# EAGLE board SISTEM MINIMUM ATMEGA16 trace LCD ADC 298 (EAGLE 5.06)
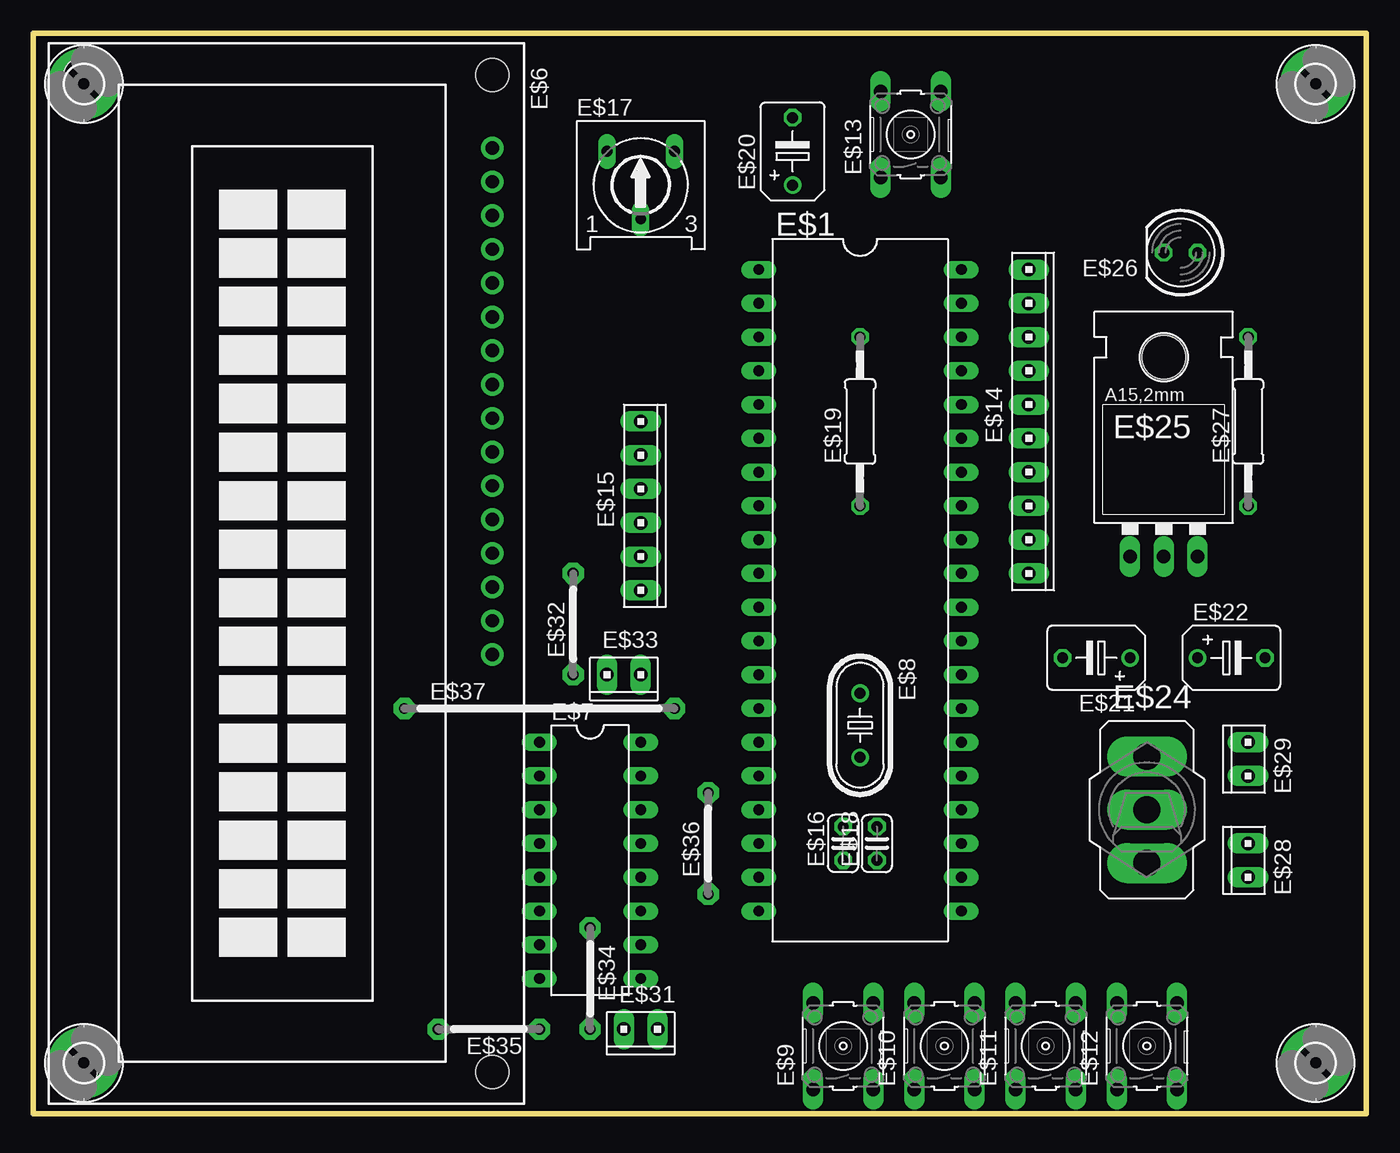
[diagram p0: board, top side]
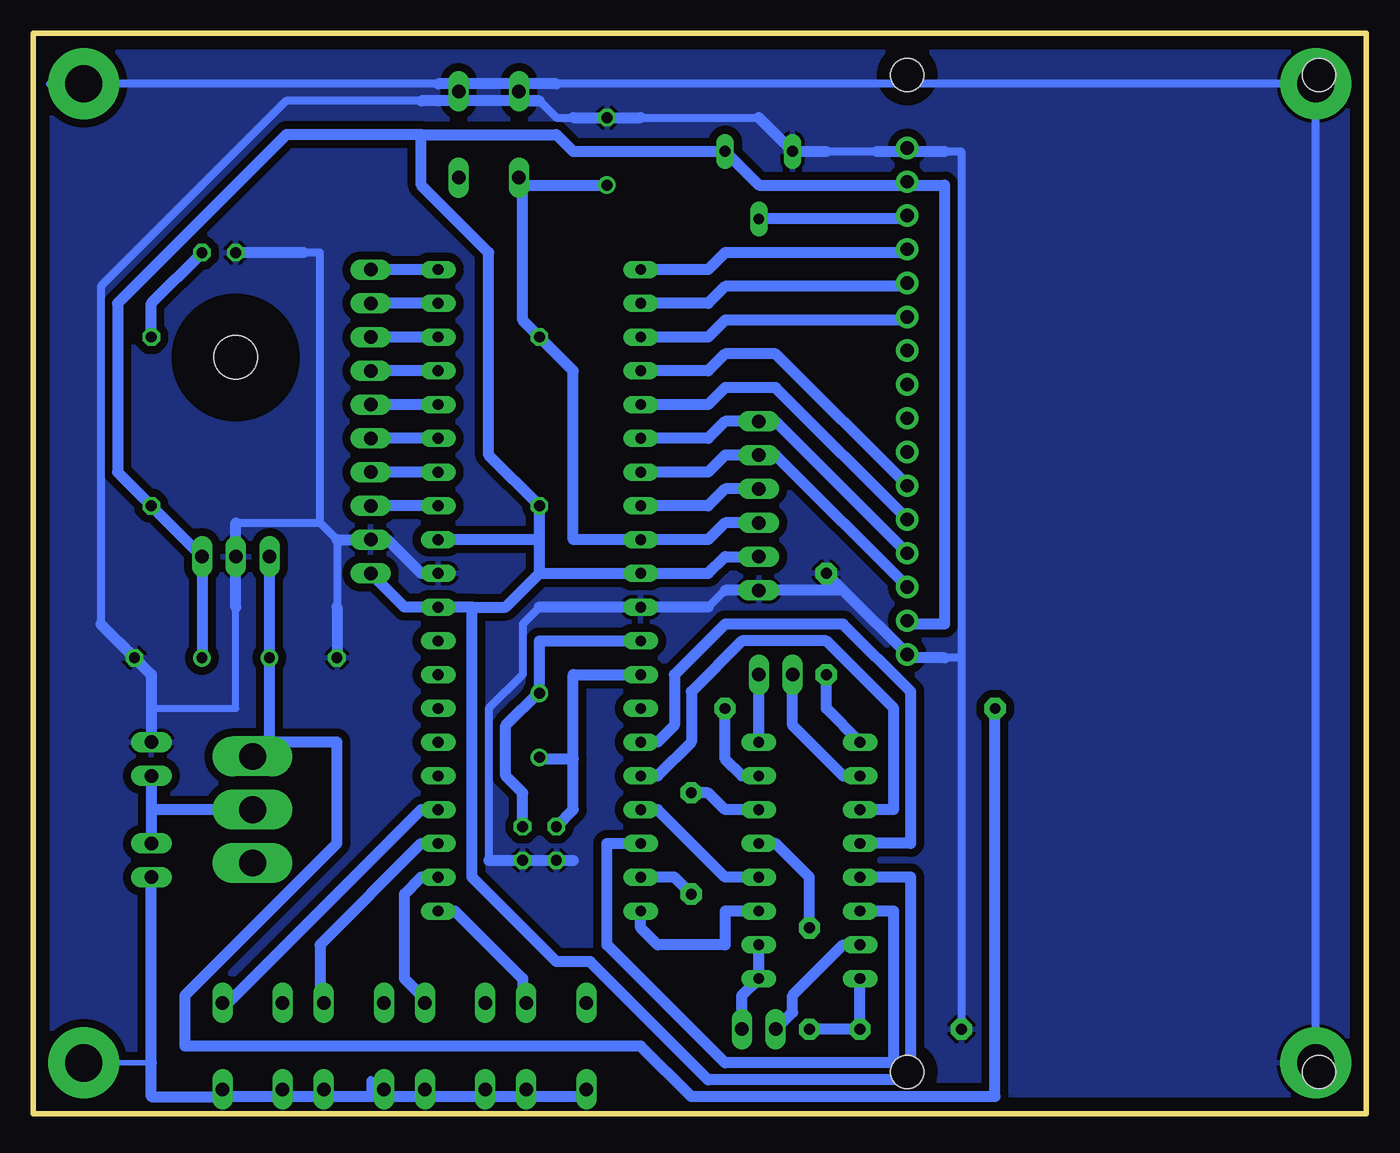
[diagram p1: board, bottom side, seen from below]

Size 100.33 x 81.28 mm. Coordinates in mm from the lower left corner, seen from the top.
Outline: 0,0 100.33,0 100.33,81.28 0,81.28 0,0
Copper layers (1*16): Top 0.035mm / dielectric 1.5mm / Bottom 0.035mm
Design rules "default *": minimum track width 20mil, minimum drill 24mil, track to track 10mil, track to pad 10mil, pad to pad 10mil, via to via 10mil, smd to smd 8mil, copper to edge 40mil, drill to drill 8mil, minimum pad ring 10mil, minimum via ring 8mil, stop-mask expansion 4mil, vias tented up to drill 0mil, thermal gap 10mil

## Footprints (pad centres in the part's own frame; a part is rotated, then mirrored left to right if it is on the bottom)
DIL40 = drill 0.813 long: 1 -24.13,-7.62; 2 -21.59,-7.62; 3 -19.05,-7.62; 4 -16.51,-7.62; 5 -13.97,-7.62; 6 -11.43,-7.62; 7 -8.89,-7.62; 8 -6.35,-7.62; 9 -3.81,-7.62; 10 -1.27,-7.62; 11 1.27,-7.62; 12 3.81,-7.62; 13 6.35,-7.62; 14 8.89,-7.62; 15 11.43,-7.62; 16 13.97,-7.62; 17 16.51,-7.62; 18 19.05,-7.62; 19 21.59,-7.62; 20 24.13,-7.62; 21 24.13,7.62; 22 21.59,7.62; 23 19.05,7.62; 24 16.51,7.62; 25 13.97,7.62; 26 11.43,7.62; 27 8.89,7.62; 28 6.35,7.62; 29 3.81,7.62; 30 1.27,7.62; 31 -1.27,7.62; 32 -3.81,7.62; 33 -6.35,7.62; 34 -8.89,7.62; 35 -11.43,7.62; 36 -13.97,7.62; 37 -16.51,7.62; 38 -19.05,7.62; 39 -21.59,7.62; 40 -24.13,7.62
2,8-PAD = drill 2.8 pad 5.334 round: B2,8 0,0
TUXGR_16X2_R2 = drill 1 pad 1.676 round: 1 -32,15.5; 2 -29.46,15.5; 3 -26.92,15.5; 4 -24.38,15.5; 5 -21.84,15.5; 6 -19.3,15.5; 7 -16.76,15.5; 8 -14.22,15.5; 9 -11.68,15.5; 10 -9.14,15.5; 11 -6.6,15.5; 12 -4.06,15.5; 13 -1.52,15.5; 14 1.02,15.5; 15 3.56,15.5; 16 6.1,15.5 | hole 2.5: -37.5,-15.5; 37.5,-15.5; -37.5,15.5; 37.5,15.5
DIL16 = drill 0.813 long: 1 -8.89,-3.81; 2 -6.35,-3.81; 3 -3.81,-3.81; 4 -1.27,-3.81; 5 1.27,-3.81; 6 3.81,-3.81; 7 6.35,-3.81; 8 8.89,-3.81; 9 8.89,3.81; 10 6.35,3.81; 11 3.81,3.81; 12 1.27,3.81; 13 -1.27,3.81; 14 -3.81,3.81; 15 -6.35,3.81; 16 -8.89,3.81
HC49U-V = drill 0.813 round: 1 -2.413,0; 2 2.413,0
B3F-10XX = drill 1.016 long: 1 -3.251,2.261; 2 3.251,2.261; 3 -3.251,-2.261; 4 3.251,-2.261
10X10MTA = drill 1.016 long: 1 11.43,0; 2 8.89,0; 3 6.35,0; 4 3.81,0; 5 1.27,0; 6 -1.27,0; 7 -3.81,0; 8 -6.35,0; 9 -8.89,0; 10 -11.43,0
10X06MTA = drill 1.016 long: 1 6.35,0; 2 3.81,0; 3 1.27,0; 4 -1.27,0; 5 -3.81,0; 6 -6.35,0
C025-024X044 = drill 0.813 octagon: 1 -1.27,0; 2 1.27,0
RS3 = drill 0.813 long: A -2.54,2.54; E 2.54,2.54; S 0,-2.54
0207/12 = drill 0.813 octagon: 1 -6.35,0; 2 6.35,0
B45181B = drill 0.813 round: + -2.54,0 | drill 0.813 octagon: - 2.54,0
320-916 = drill 2.007 long: 1 0,4.013; 2 0,0; 3 0,-4.013
78XXL = drill 1.016 long: GND 0,-3.81; IN -2.54,-3.81; OUT 2.54,-3.81 | hole 3.302: 0,11.176
LED5MM = drill 0.813 octagon: A -1.27,0; K 1.27,0
10X02MTA = drill 1.016 long: 1 1.27,0; 2 -1.27,0
07 = drill 0.813 pad 1.6 octagon: 1 -3.81,0; 2 3.81,0
20 = drill 0.813 pad 1.6 octagon: 1 -10.16,0; 2 10.16,0

## Placement (x,y rotation side)
E$1  [DIL40]  62.23,39.37 270 top
E$2  [2,8-PAD]  3.81,3.81 0 top
E$3  [2,8-PAD]  96.52,3.81 0 top
E$4  [2,8-PAD]  96.52,77.47 0 top
E$5  [2,8-PAD]  3.81,77.47 0 top
E$6  [TUXGR_16X2_R2]  19.05,40.64 270 top
E$7  [DIL16]  41.91,19.05 270 top
E$8  [HC49U-V]  62.23,29.21 270 top
E$9  [B3F-10XX]  60.96,5.08 90 top
E$10  [B3F-10XX]  68.58,5.08 90 top
E$11  [B3F-10XX]  76.2,5.08 90 top
E$12  [B3F-10XX]  83.82,5.08 90 top
E$13  [B3F-10XX]  66.04,73.66 90 top
E$14  [10X10MTA]  74.93,52.07 270 top
E$15  [10X06MTA]  45.72,45.72 270 top
E$16  [C025-024X044]  60.96,20.32 90 top
E$17  [RS3]  45.72,69.85 0 top
E$18  [C025-024X044]  63.5,20.32 90 top
E$19  [0207/12]  62.23,52.07 90 top
E$20  [B45181B]  57.15,72.39 90 top
E$21  [B45181B]  80.01,34.29 180 top
E$22  [B45181B]  90.17,34.29 0 top
E$24  [320-916]  83.82,22.86 0 top
E$25  [78XXL]  85.09,45.72 0 top
E$26  [LED5MM]  86.36,64.77 180 top
E$27  [0207/12]  91.44,52.07 90 top
E$28  [10X02MTA]  91.44,19.05 90 top
E$29  [10X02MTA]  91.44,26.67 90 top
E$31  [10X02MTA]  45.72,6.35 180 top
E$32  [07]  40.64,36.83 90 top
E$33  [10X02MTA]  44.45,33.02 180 top
E$34  [07]  41.91,10.16 270 top
E$35  [07]  34.29,6.35 180 top
E$36  [07]  50.8,20.32 90 top
E$37  [20]  38.1,30.48 0 top

## Library data of the parts
E$1 = atmel
E$2-E$5 = holes
E$6 = display-lcd
E$7 = ic-package
E$8 = crystal
E$9-E$13 = switch-omron
E$14 E$15 E$28 E$29 E$31 E$33 = con-amp
E$16 E$18-E$22 E$27 = resistor
E$17 = pot
E$24 = switch
E$25 = v-reg
E$26 = led
E$32 E$34-E$37 = jumper

## Nets
S$1: E$7.14 E$36.2
S$2: E$1.19 E$36.1
S$3: E$1.18 E$7.6
S$4: E$1.17 E$7.12
S$5: E$1.20 E$7.11
S$6: E$1.16 E$7.3
S$7: E$1.15 E$7.4
S$8: E$7.2 E$33.1
S$9: E$7.16 E$33.2
S$10: E$7.10 E$31.2
S$11: E$7.7 E$31.1
S$12: E$7.1 E$32.1
S$13: E$7.15 E$37.2
S$14: E$7.13 E$34.1
S$15: E$7.8 E$34.2 E$35.1
S$16: E$1.12 E$18.2
S$17: E$1.13 E$16.2
S$18: E$1.11 E$1.31 E$2.B2,8 E$5.B2,8 E$14.2 E$15.1 E$16.1 E$17.A E$18.1 E$20.- E$21.- E$22.- E$25.GND E$26.K E$29.1 E$32.2 E$35.2
S$19: E$1.3
S$20: E$1.2
S$21: E$1.1
S$22: E$1.4
S$23: E$1.6 E$15.6
S$24: E$1.7 E$15.5
S$25: E$1.8 E$15.4
S$26: E$1.9 E$15.3 E$19.2 E$20.+
S$27: E$1.10 E$1.30 E$7.5 E$14.1 E$15.2 E$17.E E$19.1 E$22.+ E$25.OUT E$27.1
S$28: E$1.5
S$29: E$17.S
S$30: E$3.B2,8 E$11.3 E$12.3 E$28.2
S$32: E$9.1 E$10.1
S$33: E$21.+ E$24.1 E$25.IN
S$34: E$1.40 E$14.10
S$35: E$1.39 E$14.9
S$36: E$1.38 E$14.8
S$37: E$1.37 E$14.7
S$38: E$1.36 E$14.6
S$39: E$1.35 E$14.5
S$40: E$1.34 E$14.4
S$41: E$1.33 E$14.3
S$42: E$26.A E$27.2
S$44: E$1.21 E$9.4
S$45: E$1.22 E$10.4
S$46: E$1.23 E$11.4
S$47: E$1.24 E$12.4
S$48: E$24.2 E$28.1 E$29.2

## Tracks (layer width: path | path; a pad name or v marks a point on that pad's centre or on a via)
S$1
  Bottom 0.813: E$36.2 49.53,24.13 48.26,22.86 E$7.14
S$2
  Bottom 0.813: E$1.19 52.07,17.78 E$36.1
S$3
  Bottom 0.813: E$7.6 35.56,15.24 35.56,3.81 48.26,3.81 57.15,12.7 57.15,20.32 E$1.18
S$4
  Bottom 0.813: E$1.17 53.34,22.86 48.26,17.78 E$7.12
S$5
  Bottom 0.813: E$7.11 48.26,15.24 48.26,12.7 53.34,12.7 54.61,13.97 E$1.20
S$6
  Bottom 0.813: E$7.3 35.56,22.86 35.56,30.48 40.64,35.56 46.99,35.56 50.8,31.75 50.8,27.94 53.34,25.4 E$1.16
S$7
  Bottom 0.813: E$1.15 53.34,27.94 52.07,29.21 52.07,33.02 48.26,36.83 39.37,36.83 34.29,31.75 34.29,20.32 E$7.4
S$8
  Bottom 0.813: E$33.1 43.18,29.21 39.37,25.4 E$7.2
S$9
  Bottom 0.61: E$7.16 E$33.2
  Bottom 0.813: E$7.16 E$33.2
S$10
  Bottom 0.813: E$31.2 46.99,8.89 45.72,10.16 E$7.10
S$11
  Bottom 0.813: E$7.7 39.37,12.7 43.18,8.89 43.18,7.62 E$31.1
S$12
  Bottom 0.813: E$32.1 40.64,30.48 E$7.1
S$13
  Bottom 0.813: E$37.2 48.26,26.67 46.99,25.4 E$7.15
S$14
  Bottom 0.813: E$7.13 44.45,20.32 41.91,17.78 E$34.1
S$15
  Bottom 0.61: E$7.8 E$35.1 E$34.2
  Bottom 0.813: E$7.8 E$35.1 E$34.2
S$16
  Bottom 0.813: E$1.12 62.23,35.56 62.23,31.75 64.77,29.21 64.77,25.4 63.5,24.13 E$18.2
S$17
  Bottom 0.813: E$16.2 59.69,22.86 59.69,26.67 | 59.69,26.67 62.23,26.67 | 59.69,26.67 59.69,33.02 E$1.13
S$18
  Bottom 0.508: E$25.GND 85.09,38.1 85.09,30.48 91.44,30.48 91.44,33.02
  Bottom 0.61: E$18.1 E$16.1 | 66.04,19.05 66.04,30.48 63.5,33.02 63.5,36.83 62.23,38.1 E$1.11 49.53,38.1 48.26,39.37 | 72.39,41.91 71.12,40.64 | 73.66,43.18 E$14.2 77.47,43.18 | 30.48,34.29 31.75,34.29 | 30.48,34.29 E$35.2 | 30.48,34.29 30.48,72.39 31.75,72.39 | 77.47,43.18 77.47,38.1 | 80.01,64.77 78.74,64.77 78.74,44.45 | 78.74,44.45 77.47,43.18 | 78.74,44.45 85.09,44.45 E$25.GND | 40.64,72.39 36.83,72.39 | 45.72,74.93 54.61,74.93 E$20.- 59.69,74.93 60.96,74.93 62.23,76.2 | 95.25,36.83 95.25,62.23 81.28,76.2 71.12,76.2 69.85,76.2 | 69.85,77.47 99.06,77.47 | 63.5,77.47 68.58,77.47 | 60.96,77.47 E$5.B2,8 E$2.B2,8
  Bottom 0.813: E$16.1 E$18.1 66.04,19.05 59.69,19.05 | 49.53,38.1 62.23,38.1 | 48.26,39.37 E$15.1 39.37,39.37 | 39.37,39.37 E$32.2 | 39.37,39.37 34.29,34.29 31.75,34.29 | E$1.31 71.12,40.64 73.66,43.18 | 80.01,64.77 E$26.K | 73.66,43.18 72.39,41.91 | 77.47,38.1 E$21.- | 77.47,43.18 73.66,43.18 | 36.83,72.39 31.75,72.39 | 85.09,38.1 85.09,44.45 | 40.64,72.39 E$17.A 45.72,74.93 | 91.44,33.02 E$22.- 95.25,36.83 91.44,33.02 | 91.44,33.02 E$29.1 | 59.69,74.93 54.61,74.93 | 71.12,76.2 62.23,76.2 63.5,76.2 63.5,77.47 60.96,77.47 68.58,77.47 | 69.85,76.2 68.58,76.2 68.58,77.47 | 68.58,77.47 69.85,77.47
  pour Bottom (isolate 0.61): 0,81.28 100.33,81.28 100.33,0 0,0
S$19
  Bottom 0.813: E$1.3 49.53,58.42 48.26,59.69 34.29,59.69
S$20
  Bottom 0.813: 34.29,62.23 48.26,62.23 49.53,60.96 E$1.2
S$21
  Bottom 0.813: E$1.1 49.53,63.5 48.26,64.77 34.29,64.77
S$22
  Bottom 0.813: 34.29,46.99 44.45,57.15 48.26,57.15 49.53,55.88 E$1.4
S$23
  Bottom 0.813: 34.29,41.91 44.45,52.07 E$15.6 48.26,52.07 49.53,50.8 E$1.6
S$24
  Bottom 0.61: 53.34,48.26 E$1.7
  Bottom 0.813: 53.34,48.26 49.53,48.26 48.26,49.53 E$15.5 44.45,49.53 34.29,39.37
S$25
  Bottom 0.813: E$1.8 49.53,45.72 48.26,46.99 E$15.4
S$26
  Bottom 0.813: E$20.+ 63.5,69.85 63.5,59.69 E$19.2 59.69,55.88 59.69,43.18 E$1.9 49.53,43.18 48.26,44.45 E$15.3
S$27
  Bottom 0.508: 68.58,38.1 E$1.30 | E$22.+ E$25.OUT E$27.1
  Bottom 0.61: 67.31,38.1 68.58,38.1
  Bottom 0.813: E$22.+ E$25.OUT E$27.1 93.98,48.26 93.98,60.96 81.28,73.66 71.12,73.66 | 71.12,73.66 71.12,69.85 66.04,64.77 66.04,49.53 E$19.1 62.23,43.18 | 62.23,43.18 69.85,43.18 | 62.23,40.64 62.23,43.18 | 62.23,40.64 E$1.10 49.53,40.64 48.26,41.91 E$15.2 | 62.23,40.64 64.77,38.1 67.31,38.1 | 67.31,38.1 E$1.30 72.39,38.1 E$14.1 | 67.31,38.1 67.31,17.78 60.96,11.43 58.42,11.43 49.53,2.54 34.29,2.54 34.29,17.78 E$7.5 | 34.29,36.83 31.75,36.83 31.75,69.85 45.72,69.85 E$17.E 59.69,72.39 60.96,73.66 71.12,73.66
S$28
  Bottom 0.813: E$1.5 49.53,53.34 48.26,54.61 44.45,54.61 34.29,44.45
S$29
  Bottom 0.813: 34.29,67.31 E$17.S
S$30
  Bottom 0.406: 91.44,3.81 E$3.B2,8
  Bottom 0.508: E$11.3 78.74,1.27 91.44,1.27 88.9,1.27 | 86.36,1.27 86.36,1.83 E$12.3
  Bottom 0.61: 74.93,1.27 78.74,1.27 80.01,1.27 | 68.58,1.27 66.04,1.27 67.31,1.27 | 68.58,1.27 74.93,1.27 | 74.93,1.27 74.93,2.54 | 68.58,1.27 71.12,1.27 72.39,1.27 | 63.5,1.27 59.69,1.27
  Bottom 0.813: E$28.2 91.44,3.81 91.44,1.27 86.36,1.27 78.74,1.27 71.12,1.27 66.04,1.27 63.5,1.27 58.42,1.27
S$32
  Bottom 0.508: E$10.1 66.04,1.27 58.42,1.27 E$9.1
S$33
  Bottom 0.508: E$21.+ E$25.IN | 82.55,27.94 E$24.1
  Bottom 0.61: E$21.+ E$25.IN
  Bottom 0.813: 27.94,30.48 27.94,1.27 50.8,1.27 54.61,5.08 88.9,5.08 88.9,8.89 77.47,20.32 77.47,27.94 82.55,27.94 | 82.55,27.94 83.82,26.67 | 82.55,27.94 E$21.+ E$25.IN
S$34
  Bottom 0.61: E$1.40 E$14.10
  Bottom 0.813: E$1.40 E$14.10
S$35
  Bottom 0.61: E$1.39 E$14.9
  Bottom 0.813: E$1.39 E$14.9
S$36
  Bottom 0.61: E$1.38 E$14.8
  Bottom 0.813: E$1.38 E$14.8
S$37
  Bottom 0.61: E$1.37 E$14.7
  Bottom 0.813: E$1.37 E$14.7
S$38
  Bottom 0.61: E$1.36 E$14.6
  Bottom 0.813: E$1.36 E$14.6
S$39
  Bottom 0.61: E$1.35 E$14.5
  Bottom 0.813: E$1.35 E$14.5
S$40
  Bottom 0.61: E$1.34 E$14.4
  Bottom 0.813: E$1.34 E$14.4
S$41
  Bottom 0.61: E$1.33 E$14.3
  Bottom 0.813: E$1.33 E$14.3
S$42
  Bottom 0.813: E$26.A 91.44,60.96 E$27.2
S$44
  Bottom 0.508: E$9.4 63.5,10.16
  Bottom 0.813: E$1.21 68.58,15.24 63.5,10.16 63.5,7.62
S$45
  Bottom 0.508: E$10.4 72.39,10.16
  Bottom 0.813: 71.12,7.62 71.12,8.89 72.39,10.16 72.39,16.51 71.12,17.78 E$1.22
S$46
  Bottom 0.508: E$11.4 78.74,12.7
  Bottom 0.61: 78.74,8.89 78.74,7.62
  Bottom 0.813: E$1.23 71.12,20.32 78.74,12.7 78.74,8.89
S$47
  Bottom 0.508: 71.12,22.86 85.09,8.89 | 85.09,8.89 86.36,8.89 | 85.09,8.89 E$12.4
  Bottom 0.813: 86.36,7.62 71.12,22.86 E$1.24
S$48
  Bottom 0.508: 91.44,22.86 E$24.2
  Bottom 0.61: 91.44,22.86 E$29.2
  Bottom 0.813: 82.55,22.86 91.44,22.86 E$28.1 E$29.2